# EAGLE board led_strip (EAGLE 5.06)
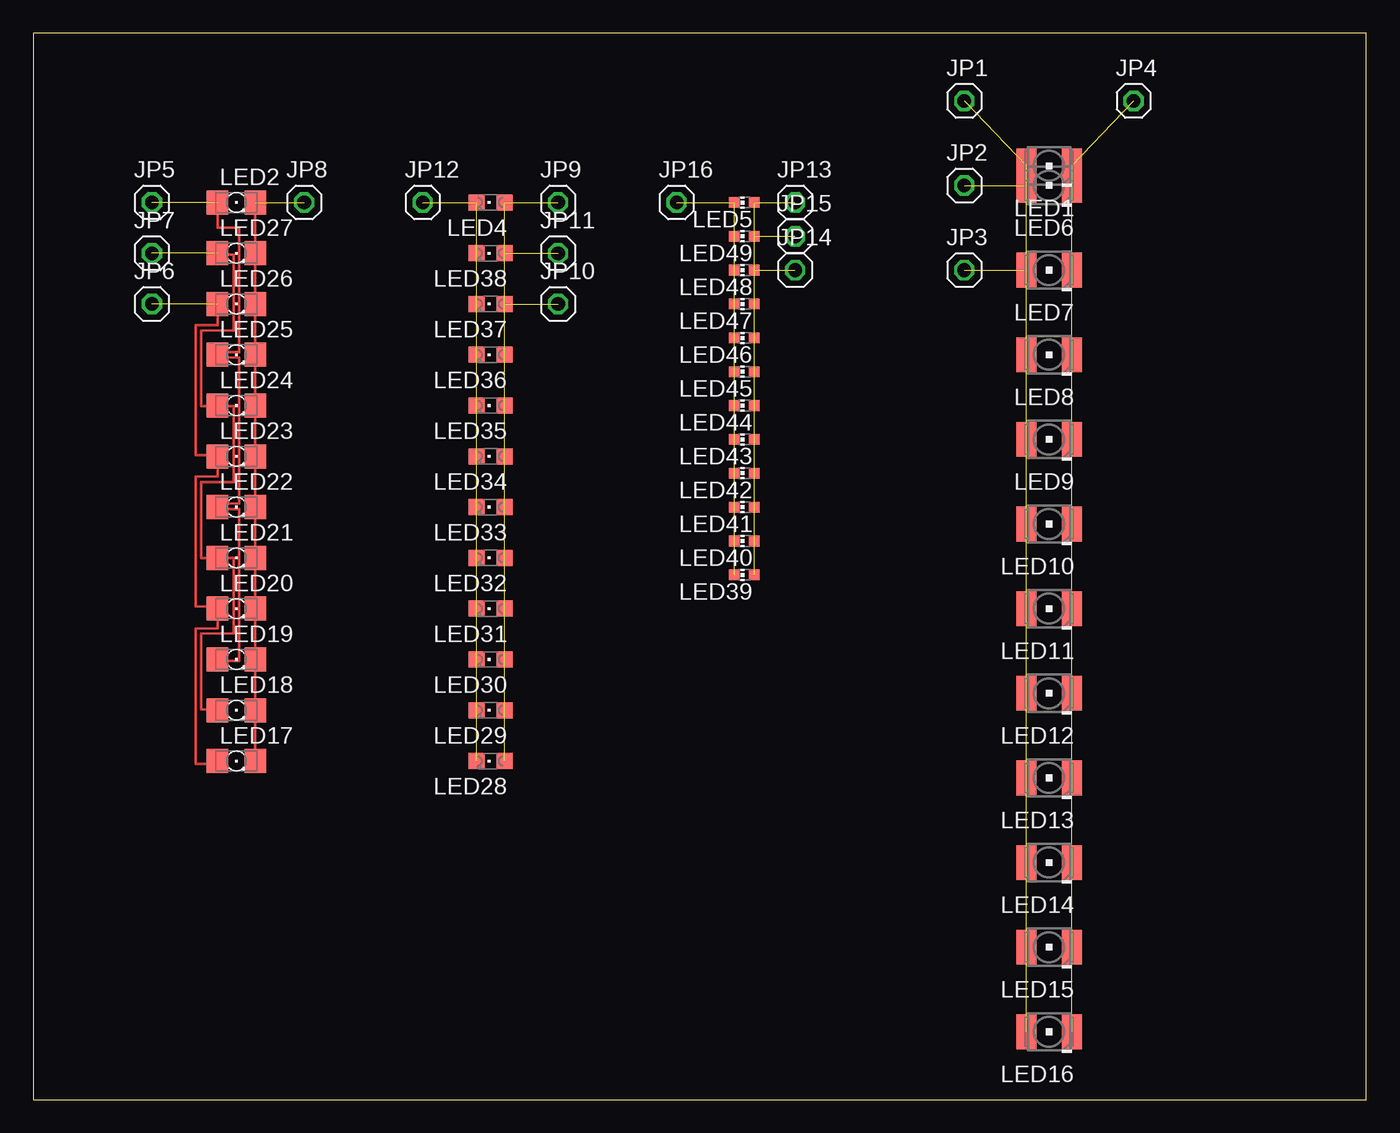
[diagram p0: board, top side]

Size 100 x 80 mm. Coordinates in mm from the lower left corner, seen from the top.
Outline: 0,0 100,0 100,80 0,80 0,0
Copper layers (1*16): Top 0.035mm / dielectric 1.5mm / Bottom 0.035mm
Design rules "default *": minimum track width 8mil, minimum drill 24mil, track to track 8mil, track to pad 8mil, pad to pad 8mil, via to via 8mil, smd to smd 8mil, copper to edge 40mil, drill to drill 8mil, minimum pad ring 10mil, minimum via ring 8mil, stop-mask expansion 4mil, vias tented up to drill 0mil, thermal gap 10mil

## Footprints (pad centres in the part's own frame; a part is rotated, then mirrored left to right if it is on the bottom)
1X01 = drill 1.016 octagon: 1 0,0
PLCC2 = smd 2.6 x 1.5: A 0,1.7; C 0,-1.7
1206 = smd 1.6 x 1.803: A -1.422,0; C 1.422,0
CHIPLED_0805 = smd 1.2 x 1.2: A 0,-1.05; C 0,1.05
CHIP-LED0603 = smd 0.8 x 0.8: A 0,-0.75; C 0,0.75

## Placement (x,y rotation side)
JP1  [1X01]  69.85,74.93 0 top
JP2  [1X01]  69.85,68.58 0 top
JP3  [1X01]  69.85,62.23 0 top
JP4  [1X01]  82.55,74.93 0 top
JP5  [1X01]  8.89,67.31 0 top
JP6  [1X01]  8.89,59.69 0 top
JP7  [1X01]  8.89,63.5 0 top
JP8  [1X01]  20.32,67.31 0 top
JP9  [1X01]  39.37,67.31 0 top
JP10  [1X01]  39.37,59.69 0 top
JP11  [1X01]  39.37,63.5 0 top
JP12  [1X01]  29.21,67.31 0 top
JP13  [1X01]  57.15,67.31 0 top
JP14  [1X01]  57.15,62.23 0 top
JP15  [1X01]  57.15,64.77 0 top
JP16  [1X01]  48.26,67.31 0 top
LED1  PLCC2  [PLCC2]  76.2,70.05 90 top
LED2  1206  [1206]  15.24,67.31 0 top
LED4  0805  [CHIPLED_0805]  34.29,67.31 90 top
LED5  0603  [CHIP-LED0603]  53.34,67.31 90 top
LED6  PLCC2  [PLCC2]  76.2,68.58 90 top
LED7  PLCC2  [PLCC2]  76.2,62.23 90 top
LED8  PLCC2  [PLCC2]  76.2,55.88 90 top
LED9  PLCC2  [PLCC2]  76.2,49.53 90 top
LED10  PLCC2  [PLCC2]  76.2,43.18 90 top
LED11  PLCC2  [PLCC2]  76.2,36.83 90 top
LED12  PLCC2  [PLCC2]  76.2,30.48 90 top
LED13  PLCC2  [PLCC2]  76.2,24.13 90 top
LED14  PLCC2  [PLCC2]  76.2,17.78 90 top
LED15  PLCC2  [PLCC2]  76.2,11.43 90 top
LED16  PLCC2  [PLCC2]  76.2,5.08 90 top
LED17  1206  [1206]  15.24,25.4 0 top
LED18  1206  [1206]  15.24,29.21 0 top
LED19  1206  [1206]  15.24,33.02 0 top
LED20  1206  [1206]  15.24,36.83 0 top
LED21  1206  [1206]  15.24,40.64 0 top
LED22  1206  [1206]  15.24,44.45 0 top
LED23  1206  [1206]  15.24,48.26 0 top
LED24  1206  [1206]  15.24,52.07 0 top
LED25  1206  [1206]  15.24,55.88 0 top
LED26  1206  [1206]  15.24,59.69 0 top
LED27  1206  [1206]  15.24,63.5 0 top
LED28  0805  [CHIPLED_0805]  34.29,25.4 90 top
LED29  0805  [CHIPLED_0805]  34.29,29.21 90 top
LED30  0805  [CHIPLED_0805]  34.29,33.02 90 top
LED31  0805  [CHIPLED_0805]  34.29,36.83 90 top
LED32  0805  [CHIPLED_0805]  34.29,40.64 90 top
LED33  0805  [CHIPLED_0805]  34.29,44.45 90 top
LED34  0805  [CHIPLED_0805]  34.29,48.26 90 top
LED35  0805  [CHIPLED_0805]  34.29,52.07 90 top
LED36  0805  [CHIPLED_0805]  34.29,55.88 90 top
LED37  0805  [CHIPLED_0805]  34.29,59.69 90 top
LED38  0805  [CHIPLED_0805]  34.29,63.5 90 top
LED39  0603  [CHIP-LED0603]  53.34,39.37 90 top
LED40  0603  [CHIP-LED0603]  53.34,41.91 90 top
LED41  0603  [CHIP-LED0603]  53.34,44.45 90 top
LED42  0603  [CHIP-LED0603]  53.34,46.99 90 top
LED43  0603  [CHIP-LED0603]  53.34,49.53 90 top
LED44  0603  [CHIP-LED0603]  53.34,52.07 90 top
LED45  0603  [CHIP-LED0603]  53.34,54.61 90 top
LED46  0603  [CHIP-LED0603]  53.34,57.15 90 top
LED47  0603  [CHIP-LED0603]  53.34,59.69 90 top
LED48  0603  [CHIP-LED0603]  53.34,62.23 90 top
LED49  0603  [CHIP-LED0603]  53.34,64.77 90 top

## Library data of the parts
JP1-JP16 = pinhead
LED1 LED6-LED16 = led; COLOR: green
LED2 LED4 LED5 LED17-LED49 = led

## Nets
N$1: JP1.1 LED1.A LED8.A LED11.A LED14.A
N$2: JP2.1 LED6.A LED9.A LED12.A LED15.A
N$3: JP3.1 LED7.A LED10.A LED13.A LED16.A
N$4: JP4.1 LED1.C LED6.C LED7.C LED8.C LED9.C LED10.C LED11.C LED12.C LED13.C LED14.C LED15.C LED16.C
N$5: JP5.1 LED2.A LED19.A LED22.A LED25.A
N$6: JP6.1 LED17.A LED20.A LED23.A LED26.A
N$7: JP7.1 LED18.A LED21.A LED24.A LED27.A
N$8: JP8.1 LED2.C LED17.C LED18.C LED19.C LED20.C LED21.C LED22.C LED23.C LED24.C LED25.C LED26.C LED27.C
N$9: JP9.1 LED4.A LED30.A LED33.A LED36.A
N$10: JP10.1 LED28.A LED31.A LED34.A LED37.A
N$11: JP11.1 LED29.A LED32.A LED35.A LED38.A
N$12: JP12.1 LED4.C LED28.C LED29.C LED30.C LED31.C LED32.C LED33.C LED34.C LED35.C LED36.C LED37.C LED38.C
N$13: JP13.1 LED5.A LED41.A LED44.A LED47.A
N$14: JP14.1 LED39.A LED42.A LED45.A LED48.A
N$15: JP15.1 LED40.A LED43.A LED46.A LED49.A
N$16: JP16.1 LED5.C LED39.C LED40.C LED41.C LED42.C LED43.C LED44.C LED45.C LED46.C LED47.C LED48.C LED49.C

## Tracks (layer width: path | path; a pad name or v marks a point on that pad's centre or on a via)
N$1  (4 unrouted)
N$2  (4 unrouted)
N$3  (4 unrouted)
N$4  (12 unrouted)
N$5  (1 unrouted)
  Top 0.203: LED2.A | LED2.A 13.82,65.43 15.44,65.43 15.44,56.08 13.82,56.08 LED25.A | LED25.A | LED25.A 13.82,55.68 15.44,55.68 15.44,44.7 13.82,44.7 LED22.A | LED22.A | LED22.A 13.82,44.3 15.44,44.3 15.44,32.92 13.82,32.92 LED19.A
N$6  (1 unrouted)
  Top 0.203: LED26.A | LED26.A 13.82,58.12 12.19,58.12 12.19,48.36 13.82,48.36 LED23.A | LED23.A | LED23.A 13.82,46.74 12.19,46.74 12.19,36.98 13.82,36.98 LED20.A | LED20.A | LED20.A 13.82,35.36 12.19,35.36 12.19,25.2 13.82,25.2 LED17.A
N$7  (1 unrouted)
  Top 0.203: LED27.A | LED27.A 13.82,63.4 15.04,63.4 15.04,57.71 12.6,57.71 12.6,52.02 13.82,52.02 | 13.82,52.02 | 13.82,52.02 LED24.A | LED24.A | 13.82,52.02 LED24.A | 13.82,52.02 15.04,52.02 15.04,46.33 12.6,46.33 12.6,40.64 LED21.A | LED21.A | LED21.A 15.04,40.64 15.04,34.95 12.6,34.95 12.6,29.26 13.82,29.26 LED18.A
N$8  (1 unrouted)
  Top 0.203: LED2.C LED27.C LED26.C LED25.C LED24.C LED23.C LED22.C LED21.C LED20.C LED19.C LED18.C LED17.C
N$9  (4 unrouted)
N$10  (4 unrouted)
N$11  (4 unrouted)
N$12  (12 unrouted)
N$13  (4 unrouted)
N$14  (4 unrouted)
N$15  (4 unrouted)
N$16  (12 unrouted)